# Altium PCB Sedrax2.PcbDoc
Units mm, origin at the board's own origin, x right, y up, seen from the top; angles counter-clockwise.
Board outline 100 x 50 mm, 2 copper layers (Top Layer, Bottom Layer); 19 components, 0 nets, 48 pads, 10 vias.
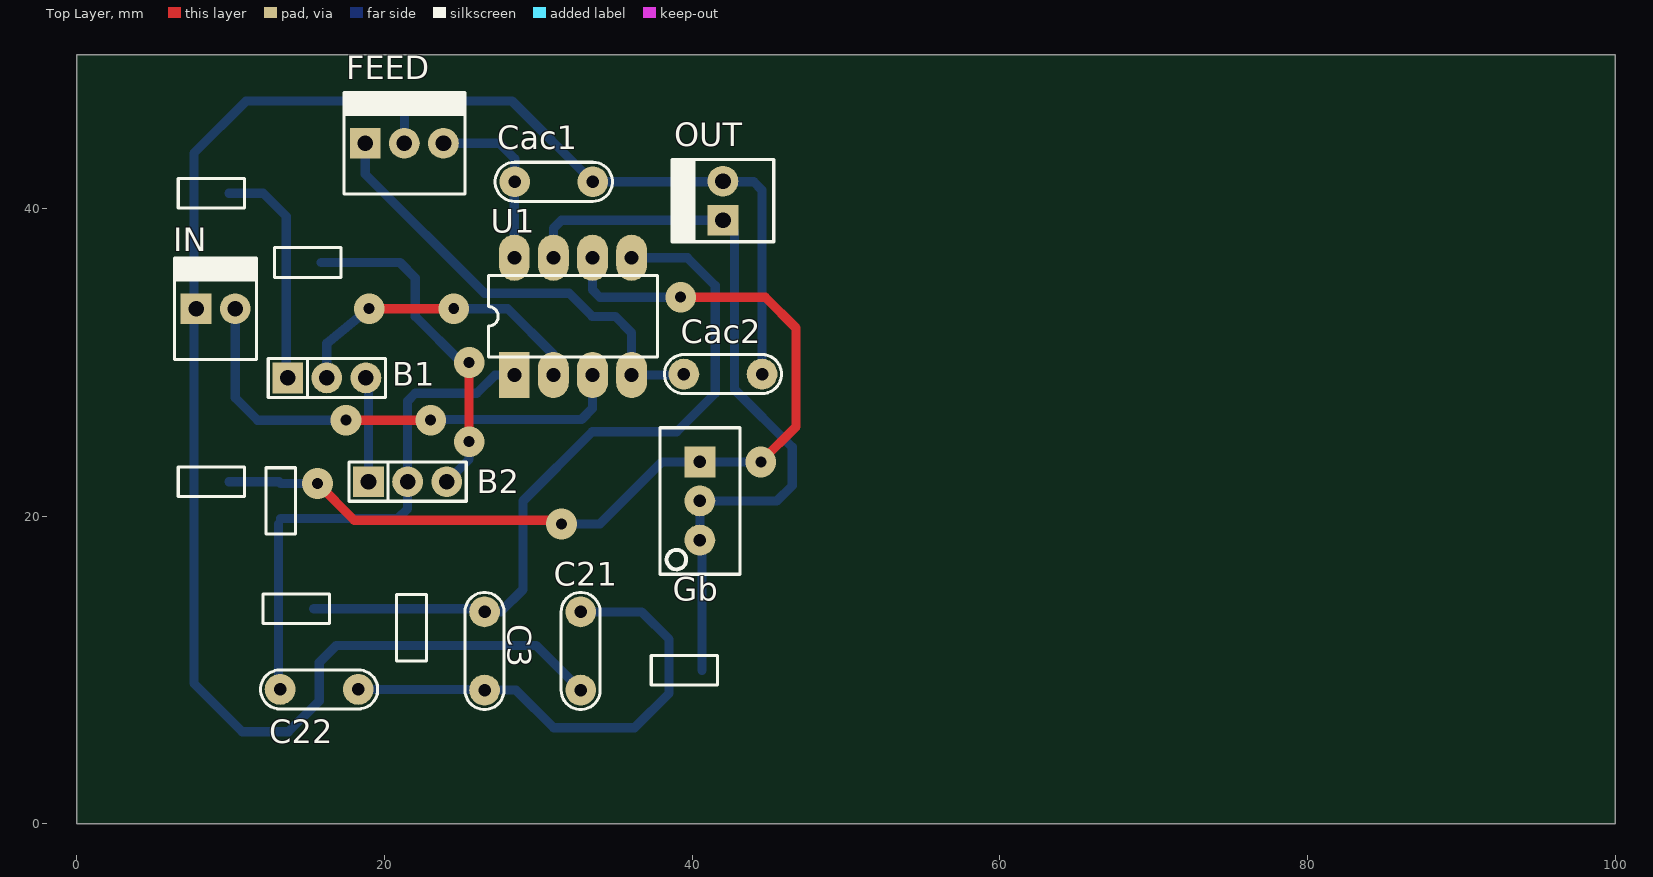
[diagram p0: Top Layer view]
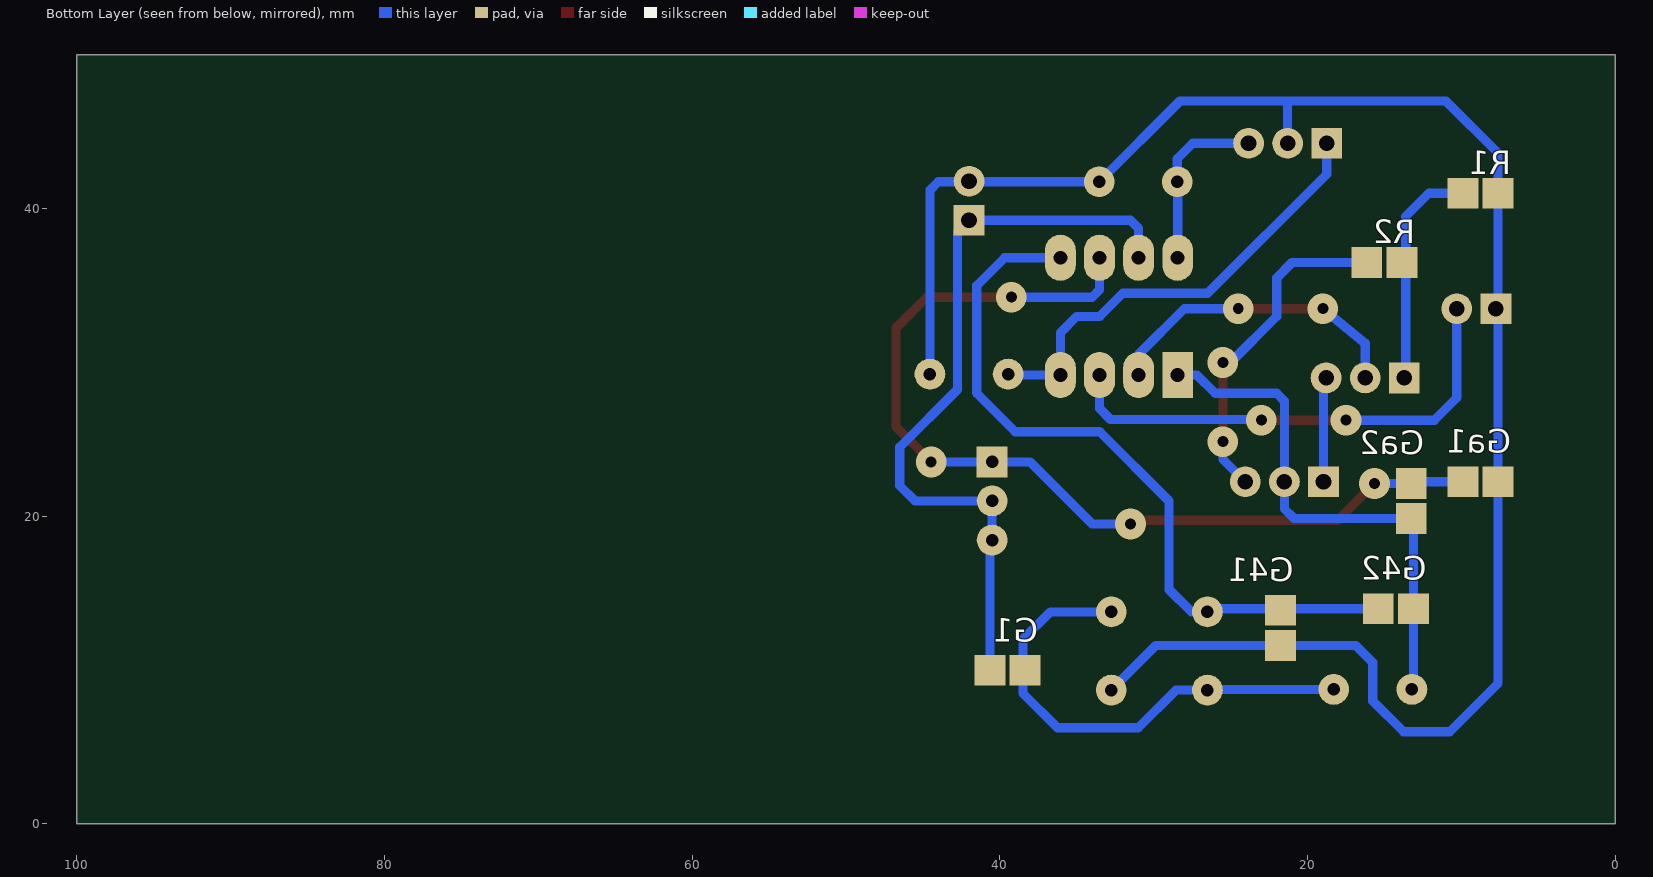
[diagram p1: Bottom Layer view, seen from below]

## Layer stack, top to bottom
Top Solder: solder mask 0.0102, Solder Resist, Dk 3.5
Top Layer: signal copper 0.0356
Dielectric 1: dielectric 0.32, FR-4, Dk 4.8
Bottom Layer: signal copper 0.0356
Bottom Solder: solder mask 0.0102, Solder Resist, Dk 3.5

## Board outline
0,0 100,0 100,50 0,50 0,0

## Design rules (kind name [scope] priority, off if disabled: settings)
Clearance [All] p1: gap=0.1
PolygonConnect [All] p1: connectstyle=Relief reliefconductorwidth=0.254 reliefentries=4 polygonreliefangle="90 Angle" airgapwidth=0.254
RoutingVias [All] p1: holewidth=0.711 width=1.27 viastyle="Through Hole" minholewidth=0.711 minwidth=1.27 maxholewidth=0.711 maxwidth=1.27
SolderMaskExpansion [All] p1: expansion=0.102
Width [All] p1: maxlimit=0.254 minlimit=0.254 preferedwidth=0.254
30 further rules are at their usual default settings.

## Components (designator, comment, footprint, x,y, rotation, side; value= is the part's Value field where it differs from the comment)
B1 "JUMPER" JUMPER3 16.25,29 r0 top
B2 "JUMPER" JUMPER3 21.5,22.25 r0 top
C3 "CAP" CAP200 26.5,11.25 r270 top
C21 "CAP" CAP200 32.75,11.25 r270 top
C22 "CAP" CAP200 15.75,8.75 r0 top
Cac1 "CAP" CAP200 31,41.75 r0 top
Cac2 "CAP" CAP200 42,29.25 r0 top
FEED "MOLEX3" MOLEX3 18.75,44.25 r0 top
G1 "RES" 0805 39.5,10 r0 top
G41 "RES" 0805 21.75,12.75 r90 top
G42 "RES" 0805 14.25,14 r0 top
Ga1 "RES" 0805 8.75,22.25 r0 top
Ga2 "RES" 0805 13.25,21 r90 top
Gb "PRESET" "PRESET V" 40.5,21 r270 top
IN "MOLEX2" MOLEX2 7.75,33.5 r0 top
OUT "MOLEX2" MOLEX2 42,39.25 r90 top
R1 "RES" 0805 8.75,41 r0 top
R2 "RES" 0805 15,36.5 r0 top
U1 "TL082ACN" DIP8 32.25,33 r0 top

## Footprints (in the part's own frame and the unit in brackets; to place one, negate y for a bottom-side part, rotate by r counter-clockwise, add the part's x,y. Pads: shape width x height; smd on the part's side, far side on the other; paste and mask are expansions set on the pad)
0805 [mm] "Pasivo 0805"
  rect 2x2 smd far side: 1(-1.143,0) 2(1.143,0)
  silkscreen extent -2.16,-0.97 2.16,0.97, body extent -1,-0.62 1,0.63, height 0.39
CAP200 [mm]
  round 2 hole 0.813: 1(-2.54,0) 2(2.54,0)
  silkscreen extent -3.81,-1.27 3.81,1.27, body extent -2.79,-1.17 2.79,1.12, height 6.24
DIP8 [mm] "DIP; 8 Leads; Row Spacing 7.62 mm; Pitch 2.54 mm"
  rect 2x3 hole 0.9: 1(-3.81,-3.81)
  oval 2x3 hole 0.9: 2(-1.27,-3.81) 3(1.27,-3.81) 4(3.81,-3.81) 5(3.81,3.81) 6(1.27,3.81) 7(-1.27,3.81) 8(-3.81,3.81)
  silkscreen extent -5.5,-2.65 5.5,2.65
JUMPER3 [mm]
  rect 2x2 hole 1.016: 1(-2.54,0)
  round 2 hole 1.016: 2(0,0) 3(2.54,0)
  silkscreen extent -3.81,-1.27 3.81,1.27, body extent -3.81,-1.3 3.81,1.27, height 16.15
MOLEX2 [mm]
  rect 2x2 hole 1.016: 1(0,0)
  round 2 hole 1.016: 2(2.54,0)
  silkscreen extent -1.4,-3.3 3.94,3.3, body extent -1.27,-3.17 3.81,3.18, height 10.74
MOLEX3 [mm]
  rect 2x2 hole 1.016: 1(0,0)
  round 2 hole 1.016: 2(2.54,0) 3(5.08,0)
  silkscreen extent -1.4,-3.3 6.48,3.3, body extent -1.27,-3.17 6.35,3.17, height 10.74
"PRESET V" [mm]
  rect 2x2 hole 0.813: 1(-2.54,0)
  round 2 hole 0.813: 2(0,0) 3(2.54,0)
  silkscreen extent -4.76,-2.6 4.76,2.6, body extent -4.7,-2.42 4.83,2.42, height 11.55

## Part data
B1 B2: library part JUMPER3
U1: "General-Purpose J-FET Dual Operational Amplifier"

## Via types
v1: diameter 2, hole 0.711, Top Layer to Bottom Layer, 10 vias

## Nets (pads, with @x,y where several pads share a name; then routed paths per layer and width w, separated by ;. In a path a pad name is that pad's centre, name@x,y a point inside that pad or via, vN(x,y) a via of type N, cw(c..) or ccw(c..) an arc to the next point about the centre after c; other vN are vias at no path point)
pads on no net: B1.1 B1.2 B1.3 B2.1 B2.2 B2.3 C3.1 C3.2 C21.1 C21.2 C22.1 C22.2 Cac1.1 Cac1.2 Cac2.1 Cac2.2 FEED.1 FEED.2 FEED.3 G1.1 G1.2 G41.1 G41.2 G42.1 G42.2 Ga1.1 Ga1.2 Ga2.1 Ga2.2 Gb.1 Gb.2 Gb.3 IN.1 IN.2 OUT.1 OUT.2 R1.1 R1.2 R2.1 R2.2 U1.1 U1.2 U1.3 U1.4 U1.5 U1.6 U1.7 U1.8
copper on no net: | length 484.9
  Top Layer w0.6: v1(15.643,22.143) 18.036,19.75 31.25,19.75 v1(31.5,19.5) ; v1(17.5,26.25) v1(23,26.25) ; v1(19,33.5) v1(24.5,33.5) ; v1(25.5,24.855) v1(25.5,30) ; v1(39.25,34.25) 44.75,34.25 46.75,32.25 46.75,25.83 v1(44.46,23.54)
  Bottom Layer w0.6: 9.893,22.25 13.143,22.25 ; 9.893,41 12.107,41 13.607,39.5 13.607,36 13.607,29.103 ; 10.29,33.5 10.29,27.71 11.75,26.25 v1@16.75,26.25 ; 13.107,8.853 13.107,14 13.107,19.5 ; 13.25,19.857 20.857,19.857 21.5,20.5 21.5,22.25 21.5,27.5 22,28 26,28 27.19,29.19 28.44,29.19 ; 13.25,22.143 v1(15.643,22.143) ; 15.393,14 26.29,14 26.5,13.79 27.54,13.79 29,15.25 29,21 33.5,25.5 39,25.5 41.5,28 41.5,35 39.69,36.81 36.06,36.81 ; 15.893,36.5 21,36.5 22,35.5 22,33 25,30 v1(25.5,30) ; 16.25,29 16.25,31.25 v1(19,33.5) ; 18.29,8.75 26.46,8.75 ; 18.75,44.25 18.75,42.25 26.5,34.5 32,34.5 33.5,33 35,33 36.06,31.94 36.06,29.19 39.4,29.19 ; 18.96,22.25 18.96,28.5 ; 21.29,44.25 21.29,46.96 ; v1(23,26.25) 23.05,26.3 32.8,26.3 33.52,27.02 33.52,29.19 ; 23.83,44.25 27.46,44.25 28.46,43.25 28.46,41.75 28.44,41.73 28.44,36.81 ; 24.04,22.25 25.5,23.71 v1(25.5,24.855) ; v1(24.5,33.5) 28,33.5 30.98,30.52 30.98,29.19 ; 26.5,8.71 28.54,8.71 31,6.25 36.25,6.25 38.5,8.5 38.5,12 36.71,13.79 32.75,13.79 32.607,13.933 ; 30.98,36.81 30.98,38.73 31.5,39.25 42,39.25 42.75,38.5 42.75,28.25 46.5,24.5 46.5,22 45.5,21 40.5,21 40.5,18.46 ; v1(31.5,19.5) 34,19.5 38.04,23.54 40.5,23.54 v1(44.46,23.54) ; 32.75,8.71 29.853,11.607 21.75,11.607 16.857,11.607 15.75,10.5 15.75,8 13.75,6 10.75,6 7.607,9.143 7.607,22.25 7.607,41 7.607,43.607 11,47 28.29,47 33.54,41.75 42.04,41.75 ; 33.52,36.81 33.52,34.73 34,34.25 v1(39.25,34.25) ; 40.643,10 40.643,18.317 ; 42,41.79 42.04,41.75 ; 44.54,29.25 44.54,41.21 44,41.75 42.04,41.75